# Altium PCB PCB.PcbDoc
Units mil, origin at the board's own origin, x right, y up, seen from the top; angles counter-clockwise.
Board outline 3255 x 1500 mil, 2 copper layers (Top Layer, Bottom Layer); 27 components, 21 nets, 76 pads, 0 vias.
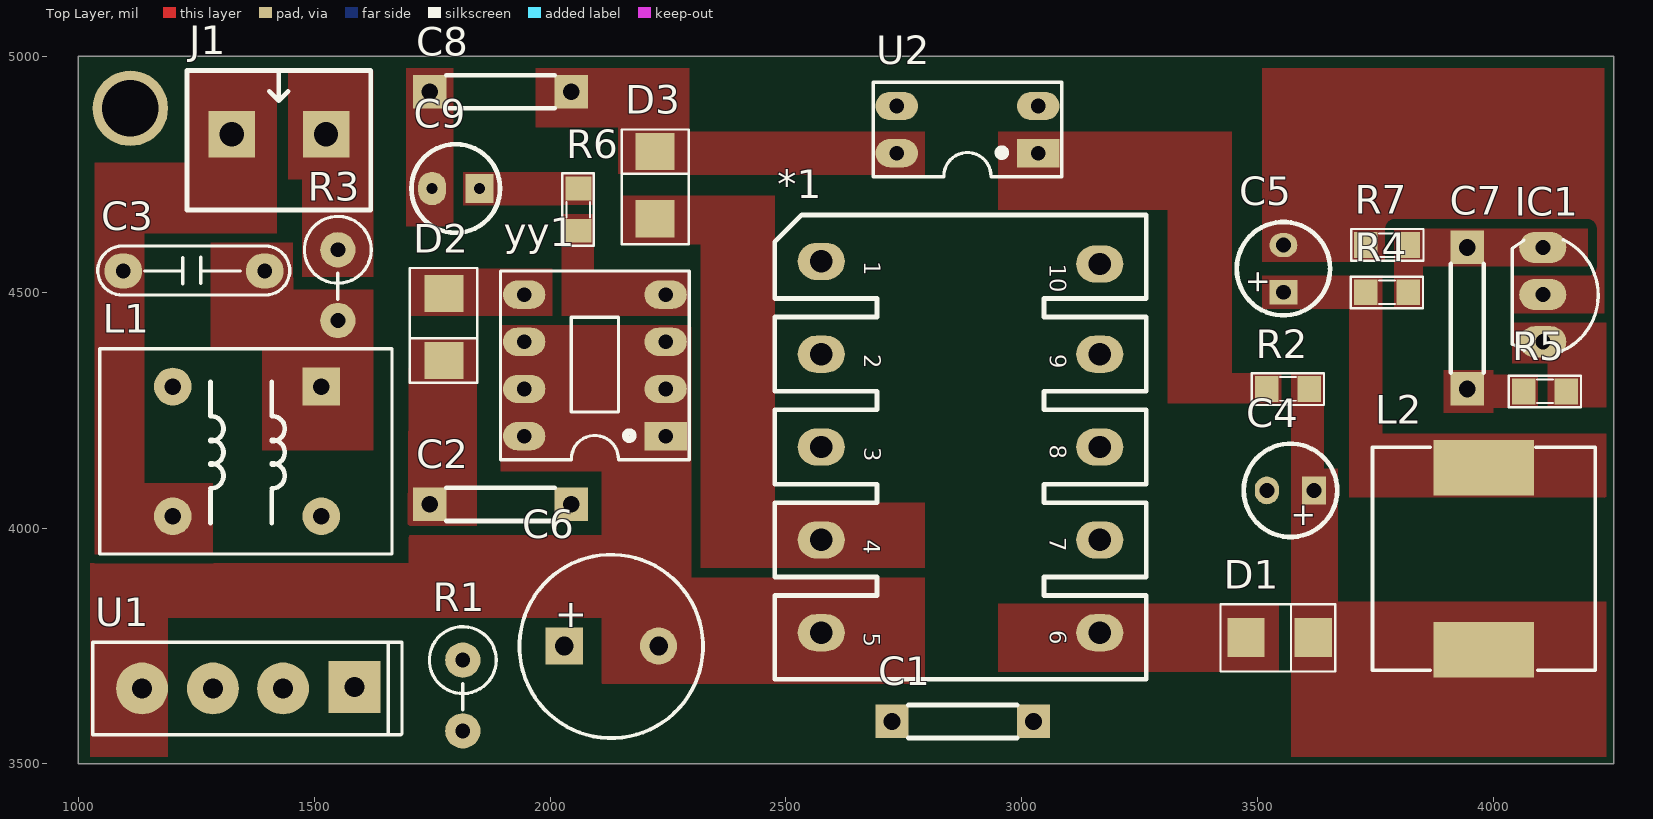
[diagram p0: Top Layer view]
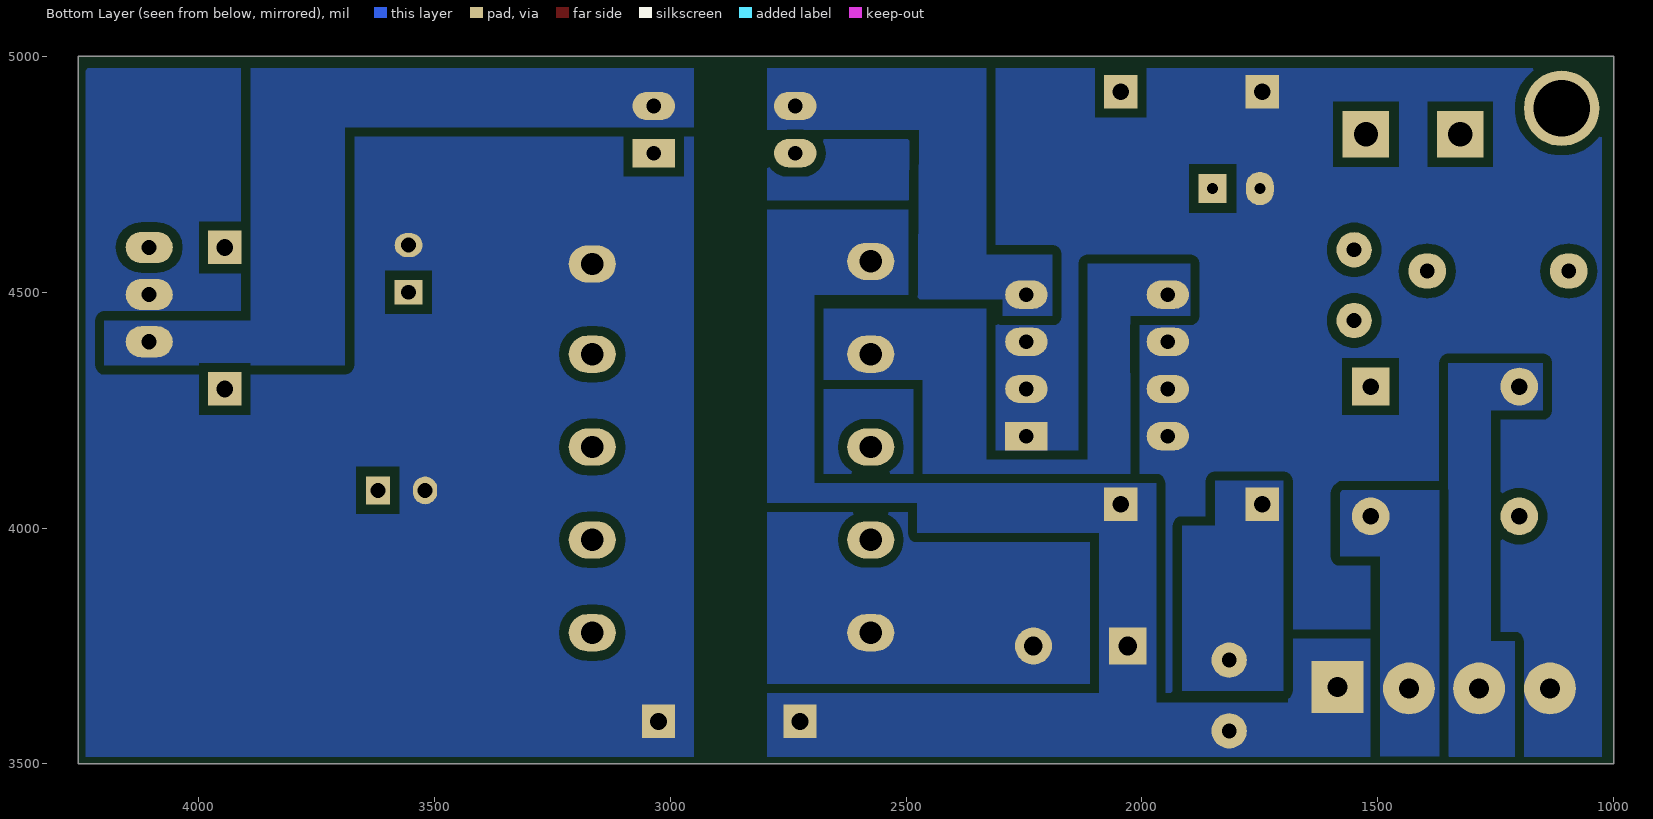
[diagram p1: Bottom Layer view, seen from below]
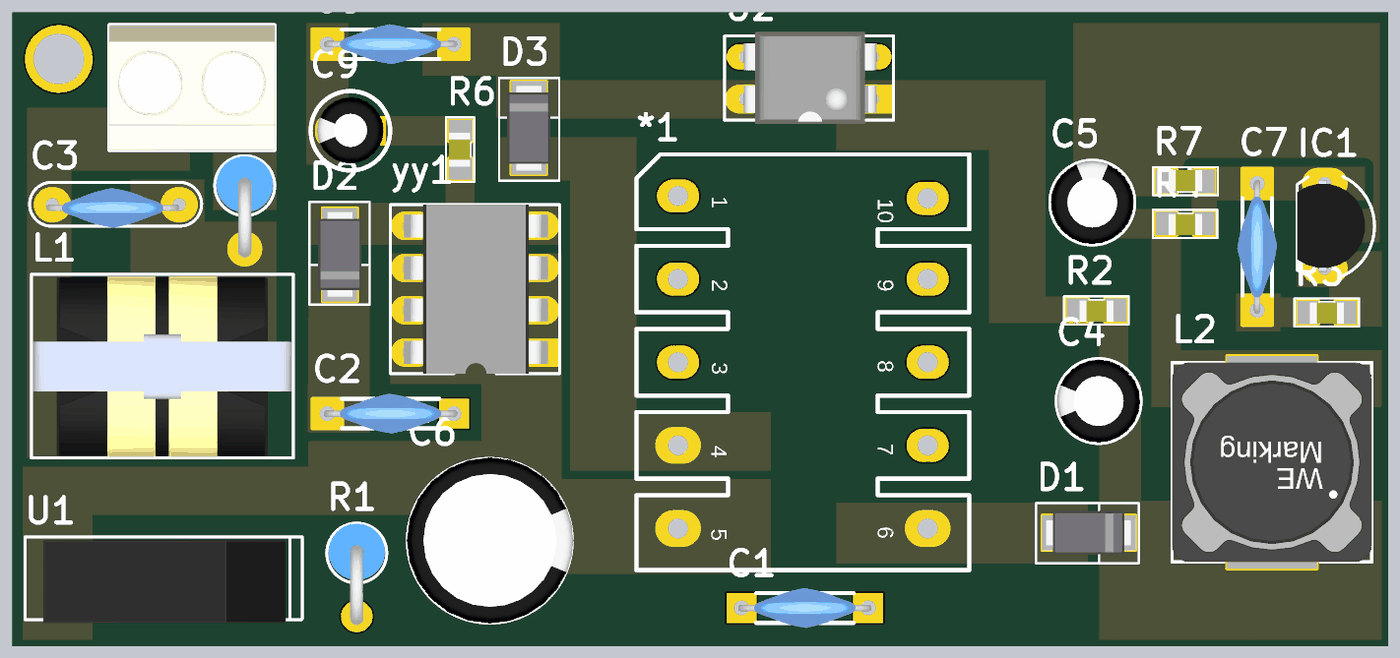
[diagram p2: 3D render of the assembled board from above, using the file's embedded part models]

## Layer stack, top to bottom
Top Solder: solder mask 0.4, Solder Resist, Dk 3.5
Top Layer: signal copper 1.4
Dielectric 1: dielectric 12.6, FR-4, Dk 4.8
Bottom Layer: signal copper 1.4
Bottom Solder: solder mask 0.4, Solder Resist, Dk 3.5

## Board outline
1000,3500 1000,5000 4255,5000 4255,3500

## Design rules (kind name [scope] priority, off if disabled: settings)
Clearance [All] p1: gap=20 ignorepadtopadclearanceinfootprint=TRUE except(0: Arc-Text Arc-Hole Track-Text Track-Hole SMDPad-Text SMDPad-Hole THPad-Text THPad-Hole Via-Text Via-Hole Fill-Text Fill-Hole Poly-Text Poly-Hole Region-Text Region-Hole Text-Text Text-Hole; 7: Arc-Arc Arc-Track Track-Track; 10: Arc-SMDPad Arc-THPad Arc-Via Track-SMDPad Track-THPad Track-Via SMDPad-SMDPad SMDPad-THPad SMDPad-Via THPad-THPad THPad-Via Via-Via)
PolygonConnect [All] p1: connectstyle=Direct reliefconductorwidth=10 reliefentries=4 polygonreliefangle="90 Angle" airgapwidth=10
RoutingVias [All] p1: holewidth=28 width=50 viastyle="Through Hole" minholewidth=28 minwidth=50 maxholewidth=28 maxwidth=50
SolderMaskExpansion [All] p1: expansion=4 istentingtop=FALSE
Width [All] p1: maxlimit=40 minlimit=20 preferedwidth=30
30 further rules are at their usual default settings.

## Components (designator, comment, footprint, x,y, rotation, side; value= is the part's Value field where it differs from the comment)
*1 "Transformer EE16" "Transformer SW" 2575,4565.55 r270 top
C1 "1nF/400V" 103/2KV 3025,3590 r180 top
C2 "1nF/400V" 103/2KV 1745,4050.2 r0 top
C3 "Capacitor Ceramic" CN3 1395,4545 r180 top value=220nF/275V
C4 "470uF/16V" C5mm 3570,4080 r180 top
C5 "470uF/16V" C5mm 3555,4550 r90 top
C6 "47uF/400V" C10mm 2130,3750 r0 top
C7 "100nF" 103/2KV 3945,4595 r270 top
C8 "100nF" 103/2KV 1745,4925 r0 top
C9 "47uF" C3MM 1800,4720 r180 top
D1 "1N5822" DO-214AC(SMA) 3525,3765 r180 top value="Diode c?m 1N5408"
D2 "1N5822" DO-214AC(SMA) 1772,4448.2 r90 top value="Diode c?m 1N5408"
D3 "1N5822" DO-214AC(SMA) 2225,4705 r270 top value="Diode c?m 1N5408"
IC1 "TL431" qto-92 4105,4495 r270 top
J1 "KF2" KF2-5.08 1425,4835 r0 top
L1 "20mH" InductorFilter 1515,4300 r270 top value="Loc 220"
L2 "3.3uH" L-SMD-M-12x10 3980,3935 r180 top value="150 mH"
R1 "100K" RES-1WD 1815,3655 r270 top value=1K
R2 "100R" SM-0805 3565,4295 r0 top value=1K
R3 "10R" RES-1WD 1550,4525 r270 top value=1K
R4 "10k" SM-0805 3775,4500 r0 top value=1K
R5 "1k" SM-0805 4110,4290 r0 top value=1K
R6 "10R" SM-0805 2060,4675 r270 top value=1K
R7 "10k" SM-0805 3775,4600 r180 top value=1K
U1 "Diode Bridge Flate" "CAU 1A" 1585,3661 r180 top
U2 "PC817" DIP4/W0.3 3035,4795 r90 top
yy1 "TOP221" DIP8/W0.3 2245,4195 r90 top

## Footprints (in the part's own frame and the unit in brackets; to place one, negate y for a bottom-side part, rotate by r counter-clockwise, add the part's x,y. Pads: shape width x height; smd on the part's side, far side on the other; paste and mask are expansions set on the pad)
103/2KV [mm]
  rect 1.8x1.8 hole 0.9: 1(0,0) 2(7.62,0)
  silkscreen extent 0.89,-0.89 6.73,0.89, body extent -0.19,-1.2 7.81,1.19, height 9.03
C3MM [mm]
  rect 1.5x1.58 hole 0.6: 1(-1.27,0)
  oval 1.5x1.8 hole 0.6: 2(1.27,0)
  silkscreen extent -2.39,-2.39 2.39,2.39, body extent -2,-2.03 1.99,1.97, height 7.01
C5mm [mm]
  rect 1.3x1.5 hole 0.8: 1(-1.27,0)
  oval 1.3x1.5 hole 0.8: 2(1.27,0)
  silkscreen extent -2.51,-2.51 2.51,2.51, body extent -2.5,-2.5 2.49,2.5, height 11.01
C10mm [mm]
  rect 2x2 hole 1: 1(-2.54,0)
  round 2 hole 1: 2(2.54,0)
  silkscreen extent -4.95,-4.96 4.93,4.92, body extent -5,-5 4.97,5, height 20.01
"CAU 1A" [mil] "CAU 1A DET"
  rect 110x110 hole 42: 1(0,-2)
  round 110 hole 42: 2(151,1) 3(300,1) 4(450,1)
  silkscreen extent -101,-97 555,99, body extent -62,-90 512,107, height 453
CN3 [mil] "Cap np W 0.3"
  oval 80x75 hole 31: 1(0,0) 2(300,0)
  silkscreen extent -53,-53 354,51, body extent 0,-39 315,55, height 419
DIP4/W0.3 [mil] "4 PIN, W 300mil, Pin to pin 100mil"
  rect 60x90 hole 31: 1(0,0)
  oval 60x90 hole 31: 2(100,0) 3(100,300) 4(0,300)
  silkscreen extent -50,-50 150,350, body extent -59,-10 159,305, height 170
DIP8/W0.3 [mil] "8 PIN, W 300mil, Pin to pin 100mil"
  rect 60x90 hole 31: 1(0,0)
  oval 60x90 hole 31: 2(100,0) 3(200,0) 4(300,0) 5(300,300) 6(200,300) 7(100,300) 8(0,300)
  silkscreen extent -50,-50 350,350, body extent -50,-40 350,336, height 201
DO-214AC(SMA) [mm] "DO-214AC Diode Smallest Size"
  rect 2x2.1 smd: 1(1.245,-0.076) 2(-2.367,-0.076)
  silkscreen extent -3.56,-1.86 2.62,1.76, body extent -3.13,-1.38 2.07,1.22, height 2.4
InductorFilter [mil]
  rect 80x80 hole 35: 1(0,0)
  round 80 hole 35: 2(275,0) 3(0,-315) 4(275,-315)
  silkscreen extent -80,-470 355,150, body extent -75,-466 352,146, height 609
KF2-5.08 [mm]
  rect 2.5x2.5 hole 1.3: 1(-2.54,0) 2(2.54,0)
  silkscreen extent -4.95,-4.08 4.95,3.43, body extent -5,-4.07 5,3.43, height 10
L-SMD-M-12x10 [mm] "WE-PDA SMD Shielded Power Inductor, 1210"
  rect 5.4x3 smd: 1(0,4.9) 2(0,-4.9)
  silkscreen extent -6,-6 6,6, body extent -6,-6 6,6, height 9.7
qto-92 [mil] "TO-92"
  oval 66x100 hole 32: 1(-100,0) 2(0,0) 3(100,0)
  silkscreen extent -117,-65 120,118, body extent -109,-66 109,95, height 245
RES-1WD [mil]
  round 75 hole 31.5: 1(-65,0) 2(85,0)
  silkscreen extent -136,-71 40,71, body extent -135,-67 105,67, height 498
SM-0805 [mil] "Compoment SMD 80x50mil"
  rect 50x55 smd: 1(-45,0) 2(45,0)
  silkscreen extent -77,-34 76,33, body extent -40,-27 40,23, height 24
"Transformer SW" [mm] "Transformer; 4 Leads"
  oval 2x2.54 hole 1.2: 1(0,0) 2(5,0) 3(10,0) 4(15,0) 5(20,0) 6(20,15) 7(15,15) 8(10,15) 9(5,15) 10(0.142,15)
  silkscreen extent -2.5,-2.5 22.5,17.5, body extent -0.5,-0.5 0.5,0.5, height 1

## Part data
C1 C2 C7 C8: library part Cap2KV, "Capacitor Ceramic 2KV", LatestRevisionDate=17-Jul-2002, LatestRevisionNote="Re-released for DXP Platform.", PackageReference=RAD-0.3, Published=8-Jun-2000, Publisher="Altium Limited"
C3: library part CapCeramic, "Capacitor", LatestRevisionDate=17-Jul-2002, LatestRevisionNote="Re-released for DXP Platform.", PackageReference=RAD-0.3, Published=8-Jun-2000, Publisher="Altium Limited"
C4 C5 C6 C9: library part "Cap Pol", "Polarized Capacitor (Axial)", LatestRevisionDate=17-Jul-2002, LatestRevisionNote="Re-released for DXP Platform.", PackageReference=POLAR0.8, Published=8-Jun-2000, Publisher="Altium Limited"
D1 D2 D3: "Schottky Rectifiers"
IC1: "Programmable Shunt Regulator"
J1: Manufacturer="Würth Elektronik eiSos GmbH", partNo=691103110002, ComponentLink1 Description=Manufacturer, ComponentLink1URL=http://www.we-online.com, ComponentLink2 Description=Datasheet, ComponentLink2URL=http://katalog.we-online.de/em/datasheet/6911031100xx.pdf, Created by="Karrer Zheng", Created Date="29 October 2013", NoPins=2
L1: library part "L fiter", "Inductor", Designed by=VanDungEvn
L2: library part Inductor, "Inductor"
R1 R2 R3 R4 R5 R6 R7: library part RM, "Resistor SMD"
U1: "Diode Bridge"
U2: "Single Opto"
yy1: library part TOP221-7PG, "Family Three-terminal Off-line PWM Switch"

## Free pads (board coordinates)
  round 160 hole 120: 3(1110,4890)

## Nets (pads, with @x,y where several pads share a name; then routed paths per layer and width w, separated by ;. In a path a pad name is that pad's centre, name@x,y a point inside that pad or via, vN(x,y) a via of type N, cw(c..) or ccw(c..) an arc to the next point about the centre after c; other vN are vias at no path point)
+5V: C5.1 L2.2 R4.1
GND: *1.10 C1.1 C4.2 C5.2 IC1.2 R7.2
Net*1_1: *1.1 C1.2 C2.2 C6.1 R1.2 U1.1
Net*1_2: *1.2 D2.1 yy1.5
Net*1_4: *1.4 D3.1
Net*1_6: *1.6 D1.1
NetC2_1: C2.1 D2.2 R1.1
NetC3_1: C3.1 L1.1 R3.2
NetC3_2: C3.2 J1.1 L1.4
NetC4_1: C4.1 D1.2 L2.1 R2.2
NetC7_1: C7.1 IC1.1 R4.2 R7.1
NetC7_2: C7.2 R5.1
NetC8_2: C8.2 D3.2 U2.4
NetC9_1: C9.1 R6.1
NetIC1_3: IC1.3 R5.2 U2.2
NetJ1_2: J1.2 R3.1
NetL1_2: L1.2 U1.2
NetL1_3: L1.3 U1.3
NetR2_1: R2.1 U2.1
NetR6_2: R6.2 U2.3 yy1.4
P_GND: *1.5 C6.2 C8.1 C9.2 U1.4 yy1.1 yy1.2 yy1.3 yy1.6 yy1.7 yy1.8
pads on no net: *1.3 *1.7 *1.8 *1.9

## Polygon pours and split planes (outlines as drawn)
+5V on Top Layer "NONET_L-01_P-001" (solid, pour order 86): 3695,4535 3765,4535 3765,4200 4240,4200 4240,4060 4235,4065 3695,4065
P_GND on Top Layer "NONET_L-01_P-001" (solid, pour order 82): 2795,3670.39 2795,3895 2299.61,3895 2299.61,4120 2110,4120 2110,3985 1700,3985 1700,3925 1025,3925 1025,3515 1189.61,3515 1189.61,3810 2110,3810 2110,3670.78 2110.39,3670.39
Net*1_4 on Top Layer "NONET_L-01_P-001" (solid, pour order 32): 2151.74,4708 2151.74,4601.7 2320,4601.7 2320,3915.34 2795,3915.34 2795,4053.74 2733.74,4053.74 2476.57,4053.74 2476.57,4705 2154.74,4705
NetC3_2 on Top Layer "NONET_L-01_P-001" (solid, pour order 17): 1230,4970 1420,4970 1420,4699.5 1420,4625 1140,4625 1140,4095 1285,4095 1285,3945 1035,3945 1035,4775 1230,4775
NetJ1_2 on Top Layer "NONET_L-01_P-001" (solid, pour order 0): 1445,4970 1625,4970 1625,4532.5 1475,4532.5 1475,4740 1445,4740
NetC9_1 on Top Layer "NONET_L-01_P-001" (solid, pour order 30): 1810,4755 1810,4685 2095,4685 2095,4755
NetC8_2 on Top Layer "NONET_L-01_P-001" (solid, pour order 31): 2294,4751 2145,4751 2145,4849.87 1970,4850.14 1970,4975 2295,4975 2295,4752
P_GND on Top Layer "NONET_L-01_P-001" (solid, pour order 29): 1695,4975 1695,4640 1795,4640 1795,4975
NetC4_1 on Top Layer "NONET_L-01_P-001" (solid, pour order 69): 3571.26,3835 3571.26,3516.26 3570,3515 4240,3515 4240,3844 3570.48,3844
GND on Top Layer "NONET_L-01_P-001" (solid, pour order 68): 4040,4455 4235,4455 4235,4975 3510,4975 3510,4634 4200,4634 4200,4555 4040,4555
NetC7_1 on Top Layer "NONET_L-01_P-001" (solid, pour order 63): 3790,4555 3790,4465 3850,4465 3851,4466 3850,4467 3850,4555
NetC7_2 on Top Layer "NONET_L-01_P-001" (solid, pour order 60): 4100,4325 4100,4255 4000,4255 4000,4245 3895,4245 3895,4335 4000,4335 4000,4325
NetIC1_3 on Top Layer "NONET_L-01_P-001" (solid, pour order 59): 4040,4435 4040,4350 4115,4350 4115,4255 4116,4256 4240,4256 4240,4435
NetC7_1 on Top Layer "NONET_L-01_P-001" (solid, pour order 56): 3995,4635 4200,4635 4200,4555 3995,4555
NetC7_1 on Top Layer "NONET_L-01_P-001" (solid, pour order 55): 3790,4635 3995,4635 3995,4555 3790,4555
+5V on Top Layer "NONET_L-01_P-001" (solid, pour order 54): 3765,4535 3765,4465 3510,4465 3510,4535
GND on Top Layer "NONET_L-01_P-001" (solid, pour order 53): 3770,4635 3770,4565 3510,4565 3510,4635
NetR2_1 on Top Layer "NONET_L-01_P-001" (solid, pour order 52): 2950,4840 2950,4675 3310,4675 3310,4265 3555,4265 3555,4330 3553,4328 3445,4328 3445,4840
NetC4_1 on Top Layer "NONET_L-01_P-001" (solid, pour order 51): 3571.26,4125.26 3571.26,4328.74 3572,4328 3640,4328 3640,4125.26
NetC4_1 on Top Layer "NONET_L-01_P-001" (solid, pour order 49): 3670,4125.26 3670,3835 3571.26,3835 3571.26,4125.26
Net*1_6 on Top Layer "NONET_L-01_P-001" (solid, pour order 45): 2950,3840 3545,3840 3545,3695 2950,3695
P_GND on Top Layer "NONET_L-01_P-001" (solid, pour order 43): 1895,4430 1895,4120 2300,4120 2300,4430
NetC8_2 on Top Layer "NONET_L-01_P-001" (solid, pour order 33): 2294.25,4840 2795,4840 2795,4749 2294,4749
NetR6_2 on Top Layer "NONET_L-01_P-001" (solid, pour order 24): 2025,4665 2025,4450 2295,4450 2295,4545 2093,4545 2093,4665
NetC2_1 on Top Layer "NONET_L-01_P-001" (solid, pour order 26): 1701.5,4404.2 1834.2,4404.2 1845,4404.2 1845,4005 1698.5,4005
Net*1_2 on Top Layer "NONET_L-01_P-001" (solid, pour order 36): 1702.74,4450 2005,4450 2005,4550 1704.24,4550 1702.74,4551.5 1702.74,4462.74
NetC3_1 on Top Layer "NONET_L-01_P-001" (solid, pour order 1): 1280,4605 1455,4605 1455,4505 1625,4505 1625,4165 1390,4165 1390,4380 1280,4380
GND on Bottom Layer "NONET_L-01_P-001" (solid, pour order 77): 2950,4975 4235,4975 4240,4970 4240,3515 2950,3515
P_GND on Bottom Layer "NONET_L-01_P-001" (solid, pour order 76): 1110,4975 2795,4975 2795,3515 1025,3515 1025,4895 1110,4895
P_GND on Bottom Layer "NONET_L-01_P-001" (solid, pour order 34): 1695,4800 1795,4800 1795,4430 2005,4430 2005,4330 1695,4330
Net*1_2 on Bottom Layer "NONET_L-01_P-001" (solid, pour order 40): 1897.5,4552.5 1897.5,4450 2025,4450 2025,4100 2465,4100 2465,4315 2685,4315 2685,4465 2330,4465 2330,4145 2115,4145 2115,4560 1897.5,4560
GND on Bottom Layer "NONET_L-01_P-001" (solid, pour order 67): 2950,3650 2950,3515 3440,3515 3440,4015 3280,4015 3280,3970 3280,3650
GND on Bottom Layer "NONET_L-01_P-001" (solid, pour order 66): 3445,4485 3445,4145 3555,4145 3555,4010 3280,4010 3280,4485
NetIC1_3 on Bottom Layer "NONET_L-01_P-001" (solid, pour order 65): 2950,4975 2950,4850 3690,4850 3690,4345 3690.5,4345.5 4200,4345.5 4200,4440 3890,4440 3890,4975
GND on Bottom Layer "NONET_L-01_P-001" (solid, pour order 64): 2950,4485 3445,4485 3445,4570 3620,4570 3620,4665 2950,4665
Net*1_1 on Bottom Layer "NONET_L-01_P-001" (solid, pour order 44): 1905,3515 1510,3515 1510,3765 1690,3765 1690,3630 1905,3630
NetR6_2 on Bottom Layer "NONET_L-01_P-001" (solid, pour order 42): 2190,4580 2190,4450 2295,4450 2295,4485 2475.07,4485 2472.5,4845 2795,4845 2795,4975 2330,4975 2330,4580
Net*1_1 on Bottom Layer "NONET_L-01_P-001" (solid, pour order 41): 1970,3810 1970,4095 2090,4095 2090,3810
Net*1_1 on Bottom Layer "NONET_L-01_P-001" (solid, pour order 39): 2495,4675 2495,4495 2695,4495 2695,4095 1970,4095 1970,3990 2476.57,3990 2476.57,4053.74 2795,4053.74 2795,4675
NetL1_3 on Bottom Layer "NONET_L-01_P-001" (solid, pour order 18): 1150,4350 1150,4250 1260,4250 1260,3760 1210,3760 1210,3515 1350,3515 1350,4350
NetC2_1 on Bottom Layer "NONET_L-01_P-001" (solid, pour order 14): 1915,3655 1915,4005 1845,4005 1845,4100 1700,4100 1700,3655 1730,3655
Net*1_1 on Bottom Layer "NONET_L-01_P-001" (solid, pour order 19): 2090,3515 2795,3515 2795,3650 2090,3650
Net*1_1 on Bottom Layer "NONET_L-01_P-001" (solid, pour order 13): 1905,3630 1970,3630 1970,3810 2090,3810 2090,3515 1905,3515
NetL1_2 on Bottom Layer "NONET_L-01_P-001" (solid, pour order 11): 1370,3515.87 1495,3515.87 1495,3940 1580,3940 1580,4075 1575,4080 1455,4080 1370,4080

## Text inside footprints (layer, text, board x,y; h text height)
*1: Top Overlay "10" at 3047.44,4559.97 h60 r270; Top Overlay "9" at 3047.44,4368.7 h60 r270; Top Overlay "8" at 3047.44,4176.85 h60 r270; Top Overlay "7" at 3047.44,3980 h60 r270; Top Overlay "6" at 3047.44,3783.15 h60 r270; Top Overlay "5" at 2653.74,3778.15 h60 r270; Top Overlay "4" at 2653.74,3975 h60 r270; Top Overlay "3" at 2655,4171.85 h60 r270; Top Overlay "2" at 2655,4368.7 h60 r270; Top Overlay "1" at 2655,4565.55 h59.06 r270
C4: Top Overlay "+" at 3625,4047 h47.24 r180
C5: Top Overlay "+" at 3522,4495 h47.24 r90
C6: Top Overlay "+" at 2010,3790 h60